# Altium PCB SEG_pressure gauge_up  V2.1.PcbDoc (part 2 of 5)
Units mm, origin at the board's own origin, x right, y up, seen from the top; angles counter-clockwise.
Board outline 67.74 x 67.74 mm, 2 copper layers (Top Layer, Bottom Layer); 36 components, 59 nets, 200 pads, 20 vias.
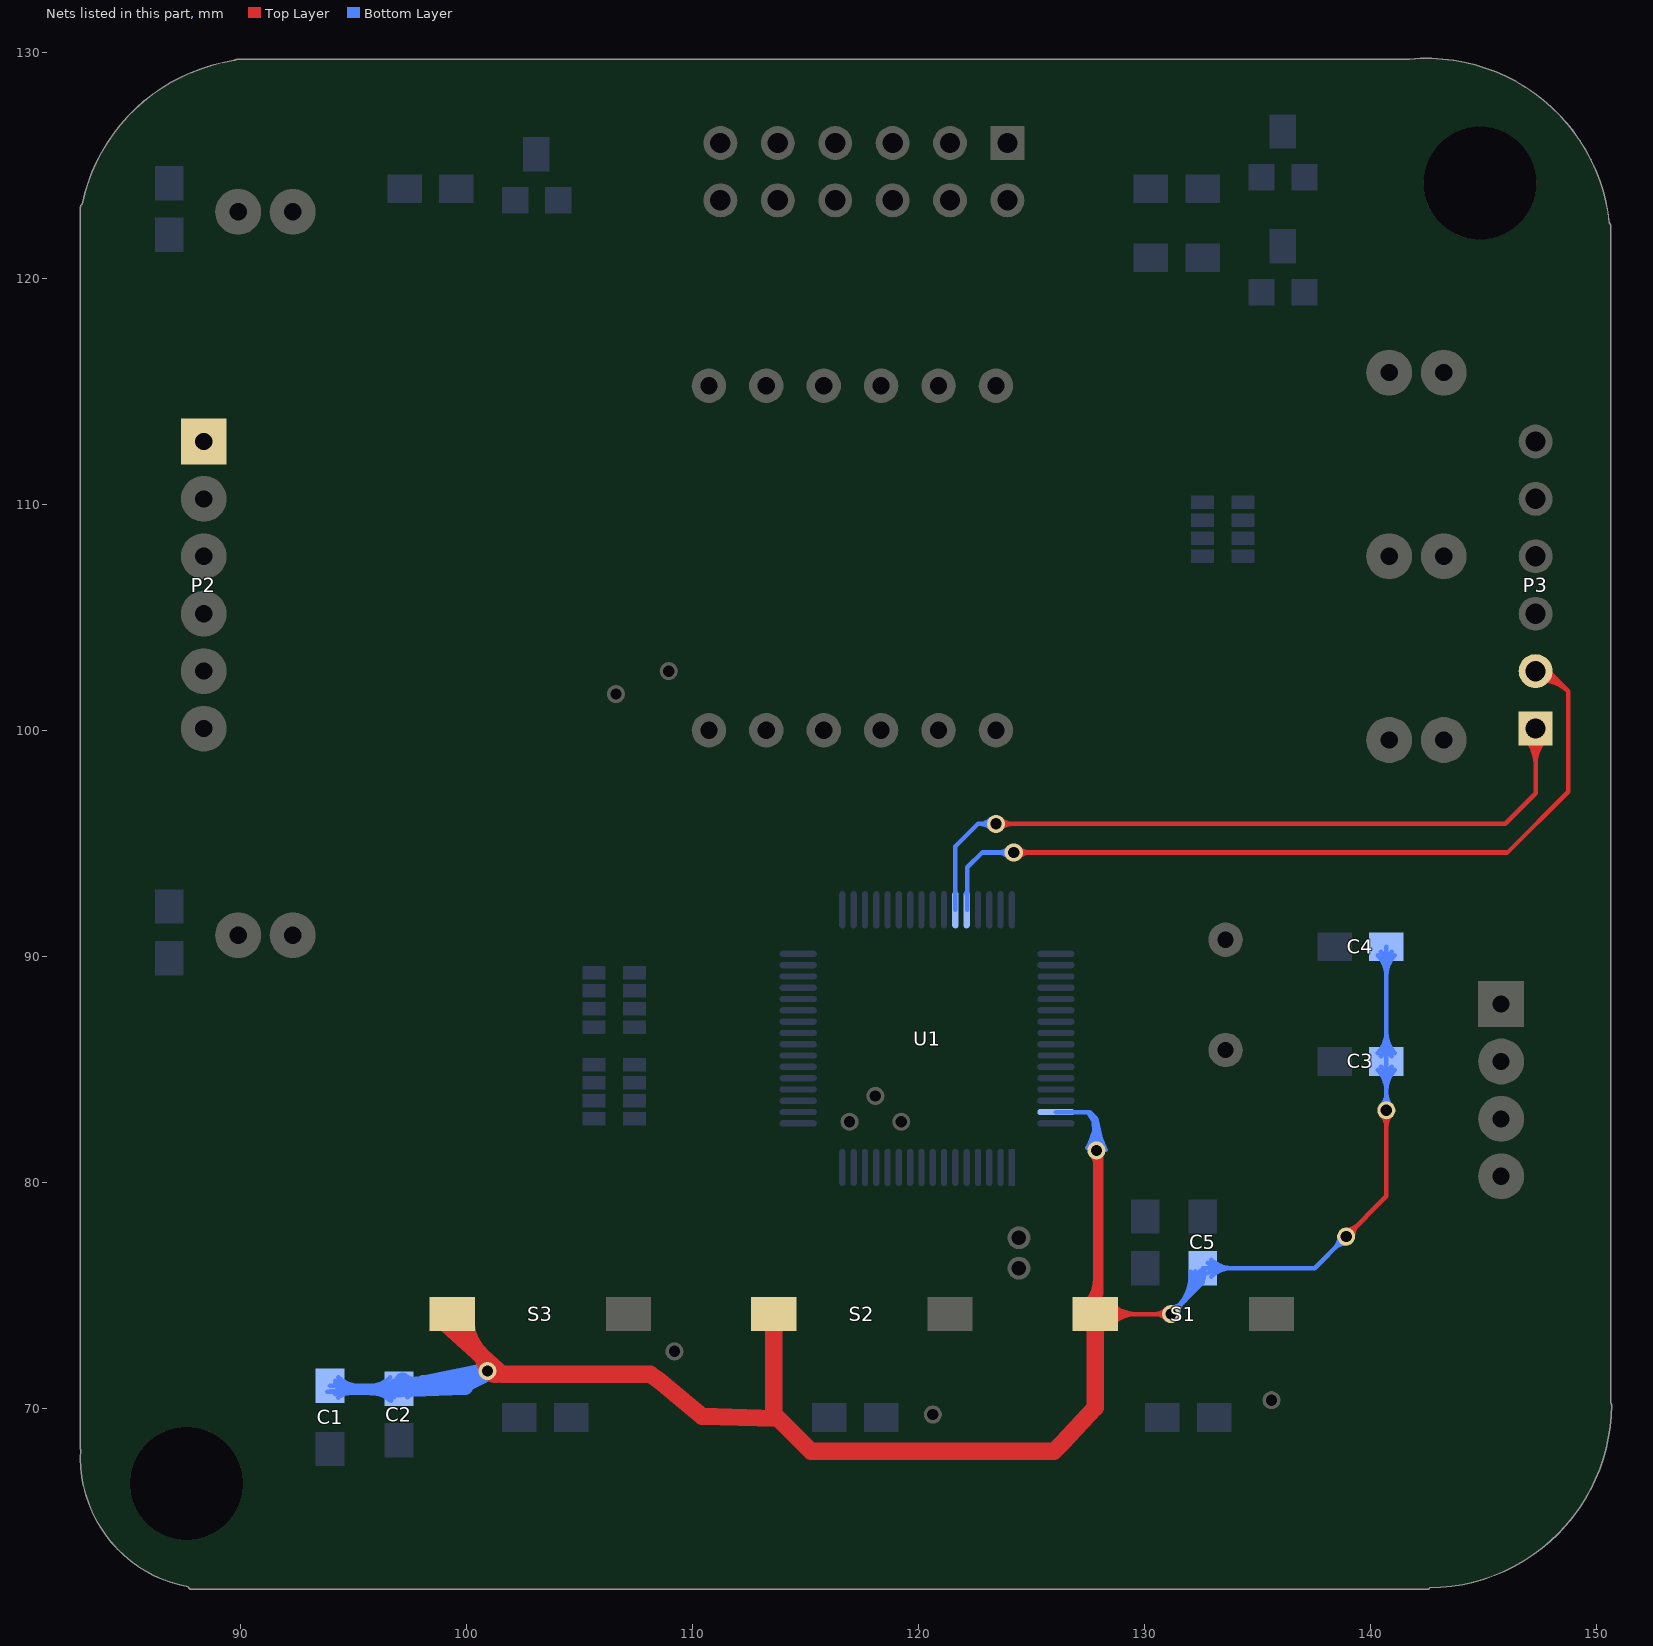
[diagram p2: the nets of this part, all layers, seen from the top]

## Via types
v1: diameter 0.8, hole 0.5, Top Layer to Bottom Layer, 20 vias

## Nets (pads, with @x,y where several pads share a name; then routed paths per layer and width w, separated by ;. In a path a pad name is that pad's centre, name@x,y a point inside that pad or via, vN(x,y) a via of type N, cw(c..) or ccw(c..) an arc to the next point about the centre after c; other vN are vias at no path point) (continued)
CONTROL1: P3.1 U1.43 | length 64.4
  Top Layer w0.203: v1(123.444,95.86) 145.974,95.86 147.32,97.206 ; 147.32,97.257 147.32,97.206 ; P3.1@147.32,100.076 147.32,97.206 ; v1@123.655,95.649 cw(c124.164,95.139) 124.164,95.86 ; v1@123.655,95.649 cw(c124.164,95.139) 124.164,95.86 ; v1@123.655,95.649 cw(c124.164,95.139) 124.164,95.86 ; v1@123.655,95.649 cw(c124.164,95.139) 124.164,95.86 ; v1@123.655,95.649 cw(c124.164,95.139) 124.164,95.86 ; v1@123.655,96.071 ccw(c124.164,96.58) 124.164,95.86 ; v1@123.655,96.071 ccw(c124.164,96.58) 124.164,95.86 ; v1@123.655,96.071 ccw(c124.164,96.58) 124.164,95.86 ; v1@123.655,96.071 ccw(c124.164,96.58) 124.164,95.86 ; v1@123.655,96.071 ccw(c124.164,96.58) 124.164,95.86 ; P3.1@146.862,99.618 cw(c145.755,98.511) 147.32,98.511 ; P3.1@146.862,99.618 cw(c145.755,98.511) 147.32,98.511 ; P3.1@146.862,99.618 cw(c145.755,98.511) 147.32,98.511 ; P3.1@146.862,99.618 cw(c145.755,98.511) 147.32,98.511 ; P3.1@146.862,99.618 cw(c145.755,98.511) 147.32,98.511 ; P3.1@147.005,99.761 cw(c146.245,99.001) 147.32,99.001 ; P3.1@147.005,99.761 cw(c146.245,99.001) 147.32,99.001 ; P3.1@147.005,99.761 cw(c146.245,99.001) 147.32,99.001 ; P3.1@147.005,99.761 cw(c146.245,99.001) 147.32,99.001 ; P3.1@147.005,99.761 cw(c146.245,99.001) 147.32,99.001 ; 147.32,98.511 cw(c148.885,98.511) P3.1@147.778,99.618 ; 147.32,98.511 cw(c148.885,98.511) P3.1@147.778,99.618 ; 147.32,98.511 cw(c148.885,98.511) P3.1@147.778,99.618 ; 147.32,98.511 cw(c148.885,98.511) P3.1@147.778,99.618 ; 147.32,98.511 cw(c148.885,98.511) P3.1@147.778,99.618 ; 147.32,99.001 cw(c148.395,99.001) P3.1@147.635,99.761 ; 147.32,99.001 cw(c148.395,99.001) P3.1@147.635,99.761 ; 147.32,99.001 cw(c148.395,99.001) P3.1@147.635,99.761 ; 147.32,99.001 cw(c148.395,99.001) P3.1@147.635,99.761 ; 147.32,99.001 cw(c148.395,99.001) P3.1@147.635,99.761
  Bottom Layer w0.203: U1.43@121.649,92.056 121.649,94.858 122.651,95.86 v1(123.444,95.86) ; 122.724,95.86 cw(c122.724,95.139) v1@123.233,95.649 ; 122.724,95.86 ccw(c122.724,96.58) v1@123.233,96.071 ; 122.724,95.86 cw(c122.724,95.139) v1@123.233,95.649 ; 122.724,95.86 ccw(c122.724,96.58) v1@123.233,96.071 ; 122.724,95.86 cw(c122.724,95.139) v1@123.233,95.649 ; 122.724,95.86 ccw(c122.724,96.58) v1@123.233,96.071 ; 122.724,95.86 cw(c122.724,95.139) v1@123.233,95.649 ; 122.724,95.86 ccw(c122.724,96.58) v1@123.233,96.071 ; 122.724,95.86 ccw(c122.724,96.58) v1@123.233,96.071 ; 122.724,95.86 cw(c122.724,95.139) v1@123.233,95.649
CONTROL2: P3.2 U1.44 | length 66
  Top Layer w0.203: v1(124.231,94.59) 146.075,94.59 148.768,97.282 148.768,101.727 147.879,102.616 P3.2@147.32,102.616 ; v1@124.442,94.379 cw(c124.952,93.869) 124.952,94.59 ; v1@124.442,94.379 cw(c124.952,93.869) 124.952,94.59 ; v1@124.442,94.379 cw(c124.952,93.869) 124.952,94.59 ; v1@124.442,94.379 cw(c124.952,93.869) 124.952,94.59 ; v1@124.442,94.379 cw(c124.952,93.869) 124.952,94.59 ; v1@124.442,94.801 ccw(c124.952,95.31) 124.952,94.59 ; v1@124.442,94.801 ccw(c124.952,95.31) 124.952,94.59 ; v1@124.442,94.801 ccw(c124.952,95.31) 124.952,94.59 ; v1@124.442,94.801 ccw(c124.952,95.31) 124.952,94.59 ; v1@124.442,94.801 ccw(c124.952,95.31) 124.952,94.59 ; P3.2@147.326,102.578 cw(c147.485,101.577) 148.201,102.293 ; P3.2@147.326,102.578 cw(c147.485,101.577) 148.201,102.293 ; P3.2@147.326,102.578 cw(c147.485,101.577) 148.201,102.293 ; P3.2@147.326,102.578 cw(c147.485,101.577) 148.201,102.293 ; P3.2@147.326,102.578 cw(c147.485,101.577) 148.201,102.293 ; P3.2@147.358,102.377 cw(c147.562,101.09) 148.483,102.011 ; P3.2@147.358,102.377 cw(c147.562,101.09) 148.483,102.011 ; P3.2@147.358,102.377 cw(c147.562,101.09) 148.483,102.011 ; P3.2@147.358,102.377 cw(c147.562,101.09) 148.483,102.011 ; P3.2@147.358,102.377 cw(c147.562,101.09) 148.483,102.011 ; P3.2@147.39,102.176 cw(c147.639,100.604) 148.765,101.73 ; P3.2@147.39,102.176 cw(c147.639,100.604) 148.765,101.73 ; P3.2@147.39,102.176 cw(c147.639,100.604) 148.765,101.73 ; P3.2@147.39,102.176 cw(c147.639,100.604) 148.765,101.73 ; P3.2@147.39,102.176 cw(c147.639,100.604) 148.765,101.73
  Bottom Layer w0.203: U1.44@122.122,92.768 ccw(c121.996,92.895) 122.175,92.895 ; U1.44@122.175,92.056 122.175,93.93 122.834,94.59 v1(124.231,94.59) ; 123.511,94.59 cw(c123.511,93.869) v1@124.02,94.379 ; 123.511,94.59 ccw(c123.511,95.31) v1@124.02,94.801 ; 123.511,94.59 cw(c123.511,93.869) v1@124.02,94.379 ; 123.511,94.59 ccw(c123.511,95.31) v1@124.02,94.801 ; 123.511,94.59 cw(c123.511,93.869) v1@124.02,94.379 ; 123.511,94.59 ccw(c123.511,95.31) v1@124.02,94.801 ; 123.511,94.59 cw(c123.511,93.869) v1@124.02,94.379 ; 123.511,94.59 ccw(c123.511,95.31) v1@124.02,94.801 ; 123.511,94.59 ccw(c123.511,95.31) v1@124.02,94.801 ; 123.511,94.59 cw(c123.511,93.869) v1@124.02,94.379
GND: C1.2 C2.2 C3.1 C4.1 C5.1 P2.1 pad.2@138.938,77.597 pad.3@140.716,83.185 pad.4 pad.18 S1.2 S2.2 S3.2 U1.63 | length 661.5
  Top Layer w0.203: S3.2@99.388,74.168 99.388,73.492 99.388,73.205 ; 101.6,71.501 101.092,71.501 pad.18@100.944,71.649 99.388,73.205 ; 108.153,71.501 108.585,71.501 110.437,69.649 113.612,69.649 ; S2.2@113.612,74.168 113.612,69.748 113.612,69.649 ; 113.716,69.545 113.612,69.649 ; 126.365,68.453 127.836,69.924 127.836,70.028 ; 128.092,75.032 128.092,81.204 127.994,75.135 ; pad.4@131.191,74.168 S1.2@127.836,74.168 ; pad.2@138.938,77.597 140.716,79.375 pad.3@140.716,83.185 ; S3.2@99.144,73.567 cw(c98.997,73.205) 99.388,73.205 ; S3.2@99.144,73.567 cw(c98.997,73.205) 99.388,73.205 ; S3.2@99.144,73.567 cw(c98.997,73.205) 99.388,73.205 ; S3.2@99.144,73.567 cw(c98.997,73.205) 99.388,73.205 ; S3.2@99.144,73.567 cw(c98.997,73.205) 99.388,73.205 ; 99.388,73.205 cw(c99.779,73.205) S3.2@99.632,73.567 ; 99.388,73.205 cw(c99.779,73.205) S3.2@99.632,73.567 ; 99.388,73.205 cw(c99.779,73.205) S3.2@99.632,73.567 ; 99.388,73.205 cw(c99.779,73.205) S3.2@99.632,73.567 ; 99.388,73.205 cw(c99.779,73.205) S3.2@99.632,73.567 ; 100.435,72.158 cw(c99.925,71.649) pad.18@100.646,71.649 ; 100.435,72.158 ccw(c100.944,72.668) pad.18@100.944,71.947 ; 100.435,72.158 cw(c99.925,71.649) pad.18@100.646,71.649 ; 100.435,72.158 ccw(c100.944,72.668) pad.18@100.944,71.947 ; 100.435,72.158 cw(c99.925,71.649) pad.18@100.646,71.649 ; 100.435,72.158 ccw(c100.944,72.668) pad.18@100.944,71.947 ; 100.435,72.158 cw(c99.925,71.649) pad.18@100.646,71.649 ; 100.435,72.158 ccw(c100.944,72.668) pad.18@100.944,71.947 ; 100.435,72.158 ccw(c100.944,72.668) pad.18@100.944,71.947 ; 100.435,72.158 cw(c99.925,71.649) pad.18@100.646,71.649 ; S2.2@113.154,73.71 cw(c112.047,72.603) 113.612,72.603 ; S2.2@113.154,73.71 cw(c112.047,72.603) 113.612,72.603 ; S2.2@113.154,73.71 cw(c112.047,72.603) 113.612,72.603 ; S2.2@113.154,73.71 cw(c112.047,72.603) 113.612,72.603 ; S2.2@113.154,73.71 cw(c112.047,72.603) 113.612,72.603 ; S2.2@113.297,73.853 cw(c112.537,73.093) 113.612,73.093 ; S2.2@113.297,73.853 cw(c112.537,73.093) 113.612,73.093 ; S2.2@113.297,73.853 cw(c112.537,73.093) 113.612,73.093 ; S2.2@113.297,73.853 cw(c112.537,73.093) 113.612,73.093 ; S2.2@113.297,73.853 cw(c112.537,73.093) 113.612,73.093 ; 113.612,72.603 cw(c115.177,72.603) S2.2@114.071,73.71 ; 113.612,72.603 cw(c115.177,72.603) S2.2@114.071,73.71 ; 113.612,72.603 cw(c115.177,72.603) S2.2@114.071,73.71 ; 113.612,72.603 cw(c115.177,72.603) S2.2@114.071,73.71 ; 113.612,72.603 cw(c115.177,72.603) S2.2@114.071,73.71 ; 113.612,73.093 cw(c114.687,73.093) S2.2@113.927,73.853 ; 113.612,73.093 cw(c114.687,73.093) S2.2@113.927,73.853 ; 113.612,73.093 cw(c114.687,73.093) S2.2@113.927,73.853 ; 113.612,73.093 cw(c114.687,73.093) S2.2@113.927,73.853 ; 113.612,73.093 cw(c114.687,73.093) S2.2@113.927,73.853 ; S1.2@127.378,74.626 ccw(c126.271,75.733) 127.836,75.733 ; S1.2@127.378,74.626 ccw(c126.271,75.733) 127.836,75.733 ; S1.2@127.378,74.626 ccw(c126.271,75.733) 127.836,75.733 ; S1.2@127.378,74.626 ccw(c126.271,75.733) 127.836,75.733 ; S1.2@127.378,74.626 ccw(c126.271,75.733) 127.836,75.733 ; S1.2@127.521,74.483 ccw(c126.761,75.243) 127.836,75.243 ; S1.2@127.521,74.483 ccw(c126.761,75.243) 127.836,75.243 ; S1.2@127.521,74.483 ccw(c126.761,75.243) 127.836,75.243 ; S1.2@127.521,74.483 ccw(c126.761,75.243) 127.836,75.243 ; S1.2@127.521,74.483 ccw(c126.761,75.243) 127.836,75.243 ; pad.4@127.675,81.199 cw(c126.651,80.208) 128.076,80.185 ; pad.4@127.675,81.199 cw(c126.651,80.208) 128.076,80.185 ; pad.4@127.675,81.199 cw(c126.651,80.208) 128.076,80.185 ; pad.4@127.675,81.199 cw(c126.651,80.208) 128.076,80.185 ; pad.4@127.675,81.199 cw(c126.651,80.208) 128.076,80.185 ; pad.4@127.678,81.196 cw(c126.678,80.196) 128.092,80.196 ; pad.4@127.678,81.196 cw(c127.297,80.815) 127.836,80.815 ; pad.4@127.678,81.196 cw(c126.678,80.196) 128.092,80.196 ; pad.4@127.678,81.196 cw(c127.297,80.815) 127.836,80.815 ; pad.4@127.678,81.196 cw(c126.678,80.196) 128.092,80.196 ; pad.4@127.678,81.196 cw(c127.297,80.815) 127.836,80.815 ; pad.4@127.678,81.196 cw(c126.678,80.196) 128.092,80.196 ; pad.4@127.678,81.196 cw(c127.297,80.815) 127.836,80.815 ; pad.4@127.678,81.196 cw(c127.297,80.815) 127.836,80.815 ; pad.4@127.678,81.196 cw(c126.678,80.196) 128.092,80.196 ; pad.4@127.681,81.193 cw(c127.18,80.675) 127.9,80.687 ; pad.4@127.681,81.193 cw(c127.18,80.675) 127.9,80.687 ; pad.4@127.681,81.193 cw(c127.18,80.675) 127.9,80.687 ; pad.4@127.681,81.193 cw(c127.18,80.675) 127.9,80.687 ; pad.4@127.681,81.193 cw(c127.18,80.675) 127.9,80.687 ; S1.2@127.776,74.488 ccw(c127.284,74.996) 127.991,74.984 ; S1.2@127.776,74.488 ccw(c127.284,74.996) 127.991,74.984 ; S1.2@127.776,74.488 ccw(c127.284,74.996) 127.991,74.984 ; S1.2@127.776,74.488 ccw(c127.284,74.996) 127.991,74.984 ; S1.2@127.776,74.488 ccw(c127.284,74.996) 127.991,74.984 ; S1.2@127.776,74.488 ccw(c127.284,74.996) 127.991,74.984 ; S1.2@127.776,74.488 ccw(c127.284,74.996) 127.991,74.984 ; S1.2@127.776,74.488 ccw(c127.284,74.996) 127.991,74.984 ; S1.2@127.776,74.488 ccw(c127.284,74.996) 127.991,74.984 ; S1.2@127.776,74.488 ccw(c127.284,74.996) 127.991,74.984 ; pad.4@127.821,81.341 cw(c127.149,80.691) 128.084,80.675 ; pad.4@127.821,81.341 cw(c127.149,80.691) 128.084,80.675 ; pad.4@127.821,81.341 cw(c127.149,80.691) 128.084,80.675 ; pad.4@127.821,81.341 cw(c127.149,80.691) 128.084,80.675 ; pad.4@127.821,81.341 cw(c127.149,80.691) 128.084,80.675 ; pad.4@127.822,81.34 cw(c127.169,80.687) 128.092,80.687 ; pad.4@127.822,81.34 cw(c127.169,80.687) 128.092,80.687 ; pad.4@127.822,81.34 cw(c127.169,80.687) 128.092,80.687 ; pad.4@127.822,81.34 cw(c127.169,80.687) 128.092,80.687 ; pad.4@127.822,81.34 cw(c127.169,80.687) 128.092,80.687 ; S1.2@127.836,74.168 127.836,81.354 pad.4@127.889,81.407 127.988,75.098 ; S1.2@127.836,74.168 127.988,75.098 ; 127.836,75.243 ccw(c128.911,75.243) S1.2@128.151,74.483 ; 127.836,75.243 ccw(c128.911,75.243) S1.2@128.151,74.483 ; 127.836,75.243 ccw(c128.911,75.243) S1.2@128.151,74.483 ; 127.836,75.243 ccw(c128.911,75.243) S1.2@128.151,74.483 ; 127.836,75.243 ccw(c128.911,75.243) S1.2@128.151,74.483 ; 127.836,75.733 ccw(c129.401,75.733) S1.2@128.295,74.626 ; 127.836,75.733 ccw(c129.401,75.733) S1.2@128.295,74.626 ; 127.836,75.733 ccw(c129.401,75.733) S1.2@128.295,74.626 ; 127.836,75.733 ccw(c129.401,75.733) S1.2@128.295,74.626 ; 127.836,75.733 ccw(c129.401,75.733) S1.2@128.295,74.626 ; 127.836,80.559 cw(c128.737,80.559) pad.4@128.1,81.196 ; 127.836,80.559 cw(c128.737,80.559) pad.4@128.1,81.196 ; 127.836,80.559 cw(c128.737,80.559) pad.4@128.1,81.196 ; 127.836,80.559 cw(c128.737,80.559) pad.4@128.1,81.196 ; 127.836,80.559 cw(c128.737,80.559) pad.4@128.1,81.196 ; 127.9,80.687 cw(c128.621,80.698) pad.4@128.103,81.199 ; 127.9,80.687 cw(c128.621,80.698) pad.4@128.103,81.199 ; 127.9,80.687 cw(c128.621,80.698) pad.4@128.103,81.199 ; 127.9,80.687 cw(c128.621,80.698) pad.4@128.103,81.199 ; 127.9,80.687 cw(c128.621,80.698) pad.4@128.103,81.199 ; 127.988,75.098 127.994,75.135 ; 127.988,75.098 127.991,74.93 127.994,75.135 ; 127.992,75.014 ccw(c128.944,74.999) S1.2@128.26,74.336 ; 127.992,75.014 ccw(c128.944,74.999) S1.2@128.26,74.336 ; 127.992,75.014 ccw(c128.944,74.999) S1.2@128.26,74.336 ; 127.992,75.014 ccw(c128.944,74.999) S1.2@128.26,74.336 ; 127.992,75.014 ccw(c128.944,74.999) S1.2@128.26,74.336 ; 127.992,75.014 ccw(c128.944,74.999) S1.2@128.26,74.336 ; 127.992,75.014 ccw(c128.944,74.999) S1.2@128.26,74.336 ; 127.992,75.014 ccw(c128.944,74.999) S1.2@128.26,74.336 ; 127.992,75.014 ccw(c128.944,74.999) S1.2@128.26,74.336 ; 127.992,75.014 ccw(c128.944,74.999) S1.2@128.26,74.336 ; S1.2@128.401,73.853 cw(c129.161,73.093) 129.161,74.168 ; S1.2@128.401,73.853 cw(c129.161,73.093) 129.161,74.168 ; S1.2@128.401,73.853 cw(c129.161,73.093) 129.161,74.168 ; S1.2@128.401,73.853 cw(c129.161,73.093) 129.161,74.168 ; S1.2@128.401,73.853 cw(c129.161,73.093) 129.161,74.168 ; S1.2@128.401,74.483 ccw(c129.161,75.243) 129.161,74.168 ; S1.2@128.401,74.483 ccw(c129.161,75.243) 129.161,74.168 ; S1.2@128.401,74.483 ccw(c129.161,75.243) 129.161,74.168 ; S1.2@128.401,74.483 ccw(c129.161,75.243) 129.161,74.168 ; S1.2@128.401,74.483 ccw(c129.161,75.243) 129.161,74.168 ; S1.2@128.545,73.71 cw(c129.651,72.603) 129.651,74.168 ; S1.2@128.545,73.71 cw(c129.651,72.603) 129.651,74.168 ; S1.2@128.545,73.71 cw(c129.651,72.603) 129.651,74.168 ; S1.2@128.545,73.71 cw(c129.651,72.603) 129.651,74.168 ; S1.2@128.545,73.71 cw(c129.651,72.603) 129.651,74.168 ; S1.2@128.545,74.626 ccw(c129.651,75.733) 129.651,74.168 ; S1.2@128.545,74.626 ccw(c129.651,75.733) 129.651,74.168 ; S1.2@128.545,74.626 ccw(c129.651,75.733) 129.651,74.168 ; S1.2@128.545,74.626 ccw(c129.651,75.733) 129.651,74.168 ; S1.2@128.545,74.626 ccw(c129.651,75.733) 129.651,74.168 ; 130.471,74.168 cw(c130.471,73.448) pad.4@130.98,73.957 ; 130.471,74.168 ccw(c130.471,74.888) pad.4@130.98,74.379 ; 130.471,74.168 cw(c130.471,73.448) pad.4@130.98,73.957 ; 130.471,74.168 ccw(c130.471,74.888) pad.4@130.98,74.379 ; 130.471,74.168 cw(c130.471,73.448) pad.4@130.98,73.957 ; 130.471,74.168 ccw(c130.471,74.888) pad.4@130.98,74.379 ; 130.471,74.168 cw(c130.471,73.448) pad.4@130.98,73.957 ; 130.471,74.168 ccw(c130.471,74.888) pad.4@130.98,74.379 ; 130.471,74.168 ccw(c130.471,74.888) pad.4@130.98,74.379 ; 130.471,74.168 cw(c130.471,73.448) pad.4@130.98,73.957 ; pad.2@138.938,77.895 ccw(c138.938,78.616) 139.447,78.106 ; pad.2@138.938,77.895 ccw(c138.938,78.616) 139.447,78.106 ; pad.2@138.938,77.895 ccw(c138.938,78.616) 139.447,78.106 ; pad.2@138.938,77.895 ccw(c138.938,78.616) 139.447,78.106 ; pad.2@138.938,77.895 ccw(c138.938,78.616) 139.447,78.106 ; pad.2@139.236,77.597 cw(c139.957,77.597) 139.447,78.106 ; pad.2@139.236,77.597 cw(c139.957,77.597) 139.447,78.106 ; pad.2@139.236,77.597 cw(c139.957,77.597) 139.447,78.106 ; pad.2@139.236,77.597 cw(c139.957,77.597) 139.447,78.106 ; pad.2@139.236,77.597 cw(c139.957,77.597) 139.447,78.106 ; pad.3@140.505,82.974 cw(c139.996,82.465) 140.716,82.465 ; pad.3@140.505,82.974 cw(c139.996,82.465) 140.716,82.465 ; pad.3@140.505,82.974 cw(c139.996,82.465) 140.716,82.465 ; pad.3@140.505,82.974 cw(c139.996,82.465) 140.716,82.465 ; pad.3@140.505,82.974 cw(c139.996,82.465) 140.716,82.465 ; 140.716,82.465 cw(c141.436,82.465) pad.3@140.927,82.974 ; 140.716,82.465 cw(c141.436,82.465) pad.3@140.927,82.974 ; 140.716,82.465 cw(c141.436,82.465) pad.3@140.927,82.974 ; 140.716,82.465 cw(c141.436,82.465) pad.3@140.927,82.974 ; 140.716,82.465 cw(c141.436,82.465) pad.3@140.927,82.974
  Top Layer w0.762: S3.2@99.111,73.965 99.123,73.73 99.388,73.492 101.164,71.893 101.6,71.501 108.153,71.501 108.585,71.196 110.437,69.649 113.716,69.545 ; S2.2@113.612,73.863 113.612,69.748 115.263,68.097 126.009,68.097 126.365,68.453 127.836,70.028 S1.2@127.836,74.168 ; S3.2@99.247,74.207 ccw(c100.314,74.101) 99.597,73.304 ; S3.2@99.247,74.207 ccw(c100.314,74.101) 99.597,73.304 ; S3.2@99.247,74.207 ccw(c100.314,74.101) 99.597,73.304 ; S3.2@99.247,74.207 ccw(c100.314,74.101) 99.597,73.304 ; S3.2@99.247,74.207 ccw(c100.314,74.101) 99.597,73.304 ; S3.2@100.005,74.132 ccw(c102.174,73.917) 100.716,72.297 ; S3.2@100.005,74.132 ccw(c102.174,73.917) 100.716,72.297 ; S3.2@100.005,74.132 ccw(c102.174,73.917) 100.716,72.297 ; S3.2@100.005,74.132 ccw(c102.174,73.917) 100.716,72.297 ; S3.2@100.005,74.132 ccw(c102.174,73.917) 100.716,72.297 ; 100.54,72.455 cw(c99.758,71.586) pad.18@100.925,71.648 ; 100.54,72.455 cw(c99.758,71.586) pad.18@100.925,71.648 ; 100.54,72.455 cw(c99.758,71.586) pad.18@100.925,71.648 ; 100.54,72.455 cw(c99.758,71.586) pad.18@100.925,71.648 ; 100.54,72.455 cw(c99.758,71.586) pad.18@100.925,71.648 ; pad.18@100.958,71.662 ccw(c101.347,72.051) 101.347,71.501 ; pad.18@100.958,71.662 ccw(c101.347,72.051) 101.347,71.501 ; pad.18@100.958,71.662 ccw(c101.347,72.051) 101.347,71.501 ; pad.18@100.958,71.662 ccw(c101.347,72.051) 101.347,71.501 ; pad.18@100.958,71.662 ccw(c101.347,72.051) 101.347,71.501 ; S2.2@113.351,73.907 cw(c112.721,73.277) 113.612,73.277 ; S2.2@113.351,73.907 cw(c112.721,73.277) 113.612,73.277 ; S2.2@113.351,73.907 cw(c112.721,73.277) 113.612,73.277 ; S2.2@113.351,73.907 cw(c112.721,73.277) 113.612,73.277 ; S2.2@113.351,73.907 cw(c112.721,73.277) 113.612,73.277 ; 113.612,73.277 cw(c114.503,73.277) S2.2@113.873,73.907 ; 113.612,73.277 cw(c114.503,73.277) S2.2@113.873,73.907 ; 113.612,73.277 cw(c114.503,73.277) S2.2@113.873,73.907 ; 113.612,73.277 cw(c114.503,73.277) S2.2@113.873,73.907 ; 113.612,73.277 cw(c114.503,73.277) S2.2@113.873,73.907 ; S1.2@127.575,73.907 cw(c126.945,73.277) 127.836,73.277 ; S1.2@127.575,73.907 cw(c126.945,73.277) 127.836,73.277 ; S1.2@127.575,73.907 cw(c126.945,73.277) 127.836,73.277 ; S1.2@127.575,73.907 cw(c126.945,73.277) 127.836,73.277 ; S1.2@127.575,73.907 cw(c126.945,73.277) 127.836,73.277 ; 127.836,73.277 cw(c128.727,73.277) S1.2@128.097,73.907 ; 127.836,73.277 cw(c128.727,73.277) S1.2@128.097,73.907 ; 127.836,73.277 cw(c128.727,73.277) S1.2@128.097,73.907 ; 127.836,73.277 cw(c128.727,73.277) S1.2@128.097,73.907 ; 127.836,73.277 cw(c128.727,73.277) S1.2@128.097,73.907
  Bottom Layer w0.203: C1.2@94.539,70.637 95.098,70.689 ; C2.2@97.561,71.222 98.104,71.081 98.247,71.044 ; 99.924,70.993 C2.2@97.028,70.866 ; U1.63@126.099,83.106 127.508,83.106 ; 127.483,81.534 127.549,81.634 127.584,81.686 ; 127.635,83.058 127.587,83.106 ; pad.4@131.191,74.168 132.588,75.565 C5.1@132.588,76.2 137.541,76.2 pad.2@138.811,77.47 ; pad.3@140.716,83.185 C3.1@140.716,85.344 C4.1@140.716,90.424 ; C1.2@94.204,70.623 cw(c95.037,69.718) 95.088,70.947 ; C1.2@94.204,70.623 cw(c95.037,69.718) 95.088,70.947 ; C1.2@94.204,70.623 cw(c95.037,69.718) 95.088,70.947 ; C1.2@94.204,70.623 cw(c95.037,69.718) 95.088,70.947 ; C1.2@94.204,70.623 cw(c95.037,69.718) 95.088,70.947 ; C1.2@94.21,71.103 ccw(c94.991,71.906) 95.036,70.786 ; C1.2@94.21,71.103 ccw(c94.991,71.906) 95.036,70.786 ; C1.2@94.21,71.103 ccw(c94.991,71.906) 95.036,70.786 ; C1.2@94.21,71.103 ccw(c94.991,71.906) 95.036,70.786 ; C1.2@94.21,71.103 ccw(c94.991,71.906) 95.036,70.786 ; C1.2@94.213,70.76 cw(c94.777,70.196) 94.777,70.993 ; C1.2@94.213,70.76 cw(c94.777,70.196) 94.777,70.993 ; C1.2@94.213,70.76 cw(c94.777,70.196) 94.777,70.993 ; C1.2@94.213,70.76 cw(c94.777,70.196) 94.777,70.993 ; C1.2@94.213,70.76 cw(c94.777,70.196) 94.777,70.993 ; C1.2@94.213,71.226 ccw(c94.777,71.79) 94.777,70.993 ; C1.2@94.213,71.226 ccw(c94.777,71.79) 94.777,70.993 ; C1.2@94.213,71.226 ccw(c94.777,71.79) 94.777,70.993 ; C1.2@94.213,71.226 ccw(c94.777,71.79) 94.777,70.993 ; C1.2@94.213,71.226 ccw(c94.777,71.79) 94.777,70.993 ; C1.2@94.276,71.012 ccw(c94.773,71.256) 94.751,70.703 ; C1.2@94.276,71.012 ccw(c94.773,71.256) 94.751,70.703 ; C1.2@94.276,71.012 ccw(c94.773,71.256) 94.751,70.703 ; C1.2@94.276,71.012 ccw(c94.773,71.256) 94.751,70.703 ; C1.2@94.276,71.012 ccw(c94.773,71.256) 94.751,70.703 ; C1.2@94.341,70.473 cw(c95.506,69.207) 95.578,70.926 ; C1.2@94.341,70.473 cw(c95.506,69.207) 95.578,70.926 ; C1.2@94.341,70.473 cw(c95.506,69.207) 95.578,70.926 ; C1.2@94.341,70.473 cw(c95.506,69.207) 95.578,70.926 ; C1.2@94.341,70.473 cw(c95.506,69.207) 95.578,70.926 ; C1.2@94.342,70.474 cw(c94.909,69.859) 94.943,70.695 ; C1.2@94.342,70.474 cw(c94.909,69.859) 94.943,70.695 ; C1.2@94.342,70.474 cw(c94.909,69.859) 94.943,70.695 ; C1.2@94.342,70.474 cw(c94.909,69.859) 94.943,70.695 ; C1.2@94.342,70.474 cw(c94.909,69.859) 94.943,70.695 ; C1.2@94.352,71.248 ccw(c95.446,72.373) 95.509,70.805 ; C1.2@94.352,71.248 ccw(c95.446,72.373) 95.509,70.805 ; C1.2@94.352,71.248 ccw(c95.446,72.373) 95.509,70.805 ; C1.2@94.352,71.248 ccw(c95.446,72.373) 95.509,70.805 ; C1.2@94.352,71.248 ccw(c95.446,72.373) 95.509,70.805 ; C1.2@94.357,70.616 cw(c95.268,69.705) 95.268,70.993 ; C1.2@94.357,70.616 cw(c95.268,69.705) 95.268,70.993 ; C1.2@94.357,70.616 cw(c95.268,69.705) 95.268,70.993 ; C1.2@94.357,70.616 cw(c95.268,69.705) 95.268,70.993 ; C1.2@94.357,70.616 cw(c95.268,69.705) 95.268,70.993 ; C1.2@94.357,71.37 ccw(c95.268,72.281) 95.268,70.993 ; C1.2@94.357,71.37 ccw(c95.268,72.281) 95.268,70.993 ; C1.2@94.357,71.37 ccw(c95.268,72.281) 95.268,70.993 ; C1.2@94.357,71.37 ccw(c95.268,72.281) 95.268,70.993 ; C1.2@94.357,71.37 ccw(c95.268,72.281) 95.268,70.993 ; C1.2@94.372,70.504 cw(c95.013,69.913) 94.978,70.784 ; C1.2@94.372,70.504 cw(c95.013,69.913) 94.978,70.784 ; C1.2@94.372,70.504 cw(c95.013,69.913) 94.978,70.784 ; C1.2@94.372,70.504 cw(c95.013,69.913) 94.978,70.784 ; C1.2@94.372,70.504 cw(c95.013,69.913) 94.978,70.784 ; C1.2@94.373,71.227 ccw(c95.001,71.806) 94.966,70.952 ; C1.2@94.373,71.227 ccw(c95.001,71.806) 94.966,70.952 ; C1.2@94.373,71.227 ccw(c95.001,71.806) 94.966,70.952 ; C1.2@94.373,71.227 ccw(c95.001,71.806) 94.966,70.952 ; C1.2@94.373,71.227 ccw(c95.001,71.806) 94.966,70.952 ; C1.2@94.459,71.101 ccw(c95.122,71.428) 95.092,70.689 ; C1.2@94.459,71.101 ccw(c95.122,71.428) 95.092,70.689 ; C1.2@94.459,71.101 ccw(c95.122,71.428) 95.092,70.689 ; C1.2@94.459,71.101 ccw(c95.122,71.428) 95.092,70.689 ; C1.2@94.459,71.101 ccw(c95.122,71.428) 95.092,70.689 ; 95.098,70.689 93.97,70.734 93.853,70.739 93.99,70.744 C2.2@97.028,70.866 ; 95.098,70.689 C2.2@97.028,70.866 ; 95.098,70.689 96.368,70.637 C2.2@97.028,70.866 ; 95.43,70.719 cw(c95.587,69.007) C2.2@96.687,70.329 ; 95.43,70.719 cw(c95.587,69.007) C2.2@96.687,70.329 ; 95.43,70.719 cw(c95.587,69.007) C2.2@96.687,70.329 ; 95.43,70.719 cw(c95.587,69.007) C2.2@96.687,70.329 ; 95.43,70.719 cw(c95.587,69.007) C2.2@96.687,70.329 ; 95.43,70.802 cw(c95.499,69.082) C2.2@96.666,70.347 ; 95.43,70.802 cw(c95.499,69.082) C2.2@96.666,70.347 ; 95.43,70.802 cw(c95.499,69.082) C2.2@96.666,70.347 ; 95.43,70.802 cw(c95.499,69.082) C2.2@96.666,70.347 ; 95.43,70.802 cw(c95.499,69.082) C2.2@96.666,70.347 ; 95.74,70.993 cw(c95.74,69.705) C2.2@96.651,70.616 ; 95.74,70.993 ccw(c95.74,72.281) C2.2@96.651,71.37 ; 95.74,70.993 cw(c95.74,69.705) C2.2@96.651,70.616 ; 95.74,70.993 ccw(c95.74,72.281) C2.2@96.651,71.37 ; 95.74,70.993 cw(c95.74,69.705) C2.2@96.651,70.616 ; 95.74,70.993 ccw(c95.74,72.281) C2.2@96.651,71.37 ; 95.74,70.993 cw(c95.74,69.705) C2.2@96.651,70.616 ; 95.74,70.993 ccw(c95.74,72.281) C2.2@96.651,71.37 ; 95.74,70.993 ccw(c95.74,72.281) C2.2@96.651,71.37 ; 95.74,70.993 cw(c95.74,69.705) C2.2@96.651,70.616 ; 95.778,70.661 ccw(c95.817,71.631) C2.2@96.599,71.055 ; 95.778,70.661 ccw(c95.817,71.631) C2.2@96.599,71.055 ; 95.778,70.661 ccw(c95.817,71.631) C2.2@96.599,71.055 ; 95.778,70.661 ccw(c95.817,71.631) C2.2@96.599,71.055 ; 95.778,70.661 ccw(c95.817,71.631) C2.2@96.599,71.055 ; 95.919,70.764 cw(c96.031,69.54) C2.2@96.817,70.485 ; 95.919,70.764 cw(c96.031,69.54) C2.2@96.817,70.485 ; 95.919,70.764 cw(c96.031,69.54) C2.2@96.817,70.485 ; 95.919,70.764 cw(c96.031,69.54) C2.2@96.817,70.485 ; 95.919,70.764 cw(c96.031,69.54) C2.2@96.817,70.485 ; 95.92,70.822 cw(c95.969,69.592) C2.2@96.804,70.496 ; 95.92,70.822 cw(c95.969,69.592) C2.2@96.804,70.496 ; 95.92,70.822 cw(c95.969,69.592) C2.2@96.804,70.496 ; 95.92,70.822 cw(c95.969,69.592) C2.2@96.804,70.496 ; 95.92,70.822 cw(c95.969,69.592) C2.2@96.804,70.496 ; 96.038,70.775 ccw(c95.96,71.627) C2.2@96.618,71.08 ; 96.038,70.775 ccw(c95.96,71.627) C2.2@96.618,71.08 ; 96.038,70.775 ccw(c95.96,71.627) C2.2@96.618,71.08 ; 96.038,70.775 ccw(c95.96,71.627) C2.2@96.618,71.08 ; 96.038,70.775 ccw(c95.96,71.627) C2.2@96.618,71.08 ; 96.042,70.827 ccw(c96.008,71.68) C2.2@96.636,71.101 ; 96.042,70.827 ccw(c96.008,71.68) C2.2@96.636,71.101 ; 96.042,70.827 ccw(c96.008,71.68) C2.2@96.636,71.101 ; 96.042,70.827 ccw(c96.008,71.68) C2.2@96.636,71.101 ; 96.042,70.827 ccw(c96.008,71.68) C2.2@96.636,71.101 ; 96.045,70.65 cw(c96.011,69.801) C2.2@96.636,70.377 ; 96.045,70.65 cw(c96.011,69.801) C2.2@96.636,70.377 ; 96.045,70.65 cw(c96.011,69.801) C2.2@96.636,70.377 ; 96.045,70.65 cw(c96.011,69.801) C2.2@96.636,70.377 ; 96.045,70.65 cw(c96.011,69.801) C2.2@96.636,70.377 ; 96.16,70.646 ccw(c96.189,71.357) C2.2@96.762,70.935 ; 96.16,70.646 ccw(c96.189,71.357) C2.2@96.762,70.935 ; 96.16,70.646 ccw(c96.189,71.357) C2.2@96.762,70.935 ; 96.16,70.646 ccw(c96.189,71.357) C2.2@96.762,70.935 ; 96.16,70.646 ccw(c96.189,71.357) C2.2@96.762,70.935 ; 96.231,70.993 cw(c96.231,70.196) C2.2@96.795,70.76 ; 96.231,70.993 ccw(c96.231,71.79) C2.2@96.795,71.226 ; 96.231,70.993 cw(c96.231,70.196) C2.2@96.795,70.76 ; 96.231,70.993 ccw(c96.231,71.79) C2.2@96.795,71.226 ; 96.231,70.993 cw(c96.231,70.196) C2.2@96.795,70.76 ; 96.231,70.993 ccw(c96.231,71.79) C2.2@96.795,71.226 ; 96.231,70.993 cw(c96.231,70.196) C2.2@96.795,70.76 ; 96.231,70.993 ccw(c96.231,71.79) C2.2@96.795,71.226 ; 96.231,70.993 ccw(c96.231,71.79) C2.2@96.795,71.226 ; 96.231,70.993 cw(c96.231,70.196) C2.2@96.795,70.76 ; C2.2@97.028,70.866 100.044,71.035 ; C2.2@97.028,70.866 98.247,71.044 ; C2.2@97.028,70.866 99.797,70.866 ; C2.2@97.028,70.866 99.857,70.907 ; C2.2@97.028,70.866 96.901,70.993 C1.2@93.98,70.993 C2.2@97.028,70.866 ; C2.2@97.141,70.935 cw(c97.578,70.71) 97.701,71.185 ; C2.2@97.141,70.935 cw(c97.578,70.71) 97.701,71.185 ; C2.2@97.141,70.935 cw(c97.578,70.71) 97.701,71.185 ; C2.2@97.141,70.935 cw(c97.578,70.71) 97.701,71.185 ; C2.2@97.141,70.935 cw(c97.578,70.71) 97.701,71.185 ; C2.2@97.248,71.239 ccw(c98.068,72.156) 98.137,70.928 ; C2.2@97.248,71.239 ccw(c98.068,72.156) 98.137,70.928 ; C2.2@97.248,71.239 ccw(c98.068,72.156) 98.137,70.928 ; C2.2@97.248,71.239 ccw(c98.068,72.156) 98.137,70.928 ; C2.2@97.248,71.239 ccw(c98.068,72.156) 98.137,70.928 ; C2.2@97.258,71.103 ccw(c97.814,71.675) 97.825,70.878 ; C2.2@97.258,71.103 ccw(c97.814,71.675) 97.825,70.878 ; C2.2@97.258,71.103 ccw(c97.814,71.675) 97.825,70.878 ; C2.2@97.258,71.103 ccw(c97.814,71.675) 97.825,70.878 ; C2.2@97.258,71.103 ccw(c97.814,71.675) 97.825,70.878 ; C2.2@97.261,70.633 cw(c97.825,70.069) 97.825,70.866 ; C2.2@97.261,70.633 cw(c97.825,70.069) 97.825,70.866 ; C2.2@97.261,70.633 cw(c97.825,70.069) 97.825,70.866 ; C2.2@97.261,70.633 cw(c97.825,70.069) 97.825,70.866 ; C2.2@97.261,70.633 cw(c97.825,70.069) 97.825,70.866 ; C2.2@97.261,71.099 ccw(c97.825,71.663) 97.825,70.866 ; C2.2@97.261,71.099 ccw(c97.825,71.663) 97.825,70.866 ; C2.2@97.261,71.099 ccw(c97.825,71.663) 97.825,70.866 ; C2.2@97.261,71.099 ccw(c97.825,71.663) 97.825,70.866 ; C2.2@97.261,71.099 ccw(c97.825,71.663) 97.825,70.866 ; C2.2@97.265,70.636 cw(c97.837,70.08) 97.825,70.878 ; C2.2@97.265,70.636 cw(c97.837,70.08) 97.825,70.878 ; C2.2@97.265,70.636 cw(c97.837,70.08) 97.825,70.878 ; C2.2@97.265,70.636 cw(c97.837,70.08) 97.825,70.878 ; C2.2@97.265,70.636 cw(c97.837,70.08) 97.825,70.878 ; C2.2@97.267,71.22 ccw(c97.992,71.908) 98.036,70.91 ; C2.2@97.267,71.22 ccw(c97.992,71.908) 98.036,70.91 ; C2.2@97.267,71.22 ccw(c97.992,71.908) 98.036,70.91 ; C2.2@97.267,71.22 ccw(c97.992,71.908) 98.036,70.91 ; C2.2@97.267,71.22 ccw(c97.992,71.908) 98.036,70.91 ; C2.2@97.322,70.842 cw(c97.809,70.591) 97.947,71.122 ; C2.2@97.322,70.842 cw(c97.809,70.591) 97.947,71.122 ; C2.2@97.322,70.842 cw(c97.809,70.591) 97.947,71.122 ; C2.2@97.322,70.842 cw(c97.809,70.591) 97.947,71.122 ; C2.2@97.322,70.842 cw(c97.809,70.591) 97.947,71.122 ; C2.2@97.383,71.391 ccw(c98.53,72.673) 98.626,70.955 ; C2.2@97.383,71.391 ccw(c98.53,72.673) 98.626,70.955 ; C2.2@97.383,71.391 ccw(c98.53,72.673) 98.626,70.955 ; C2.2@97.383,71.391 ccw(c98.53,72.673) 98.626,70.955 ; C2.2@97.383,71.391 ccw(c98.53,72.673) 98.626,70.955 ; C2.2@97.4,71.249 ccw(c98.297,72.172) 98.316,70.885 ; C2.2@97.4,71.249 ccw(c98.297,72.172) 98.316,70.885 ; C2.2@97.4,71.249 ccw(c98.297,72.172) 98.316,70.885 ; C2.2@97.4,71.249 ccw(c98.297,72.172) 98.316,70.885 ; C2.2@97.4,71.249 ccw(c98.297,72.172) 98.316,70.885 ; C2.2@97.405,70.489 cw(c98.316,69.578) 98.316,70.866 ; C2.2@97.405,70.489 cw(c98.316,69.578) 98.316,70.866 ; C2.2@97.405,70.489 cw(c98.316,69.578) 98.316,70.866 ; C2.2@97.405,70.489 cw(c98.316,69.578) 98.316,70.866 ; C2.2@97.405,70.489 cw(c98.316,69.578) 98.316,70.866 ; C2.2@97.405,71.243 ccw(c98.316,72.154) 98.316,70.866 ; C2.2@97.405,71.243 ccw(c98.316,72.154) 98.316,70.866 ; C2.2@97.405,71.243 ccw(c98.316,72.154) 98.316,70.866 ; C2.2@97.405,71.243 ccw(c98.316,72.154) 98.316,70.866 ; C2.2@97.405,71.243 ccw(c98.316,72.154) 98.316,70.866 ; C2.2@97.411,70.494 cw(c98.334,69.597) 98.316,70.885 ; C2.2@97.411,70.494 cw(c98.334,69.597) 98.316,70.885 ; C2.2@97.411,70.494 cw(c98.334,69.597) 98.316,70.885 ; C2.2@97.411,70.494 cw(c98.334,69.597) 98.316,70.885 ; C2.2@97.411,70.494 cw(c98.334,69.597) 98.316,70.885 ; C2.2@97.415,71.36 ccw(c98.421,72.315) 98.481,70.93 ; C2.2@97.415,71.36 ccw(c98.421,72.315) 98.481,70.93 ; C2.2@97.415,71.36 ccw(c98.421,72.315) 98.481,70.93 ; C2.2@97.415,71.36 ccw(c98.421,72.315) 98.481,70.93 ; C2.2@97.415,71.36 ccw(c98.421,72.315) 98.481,70.93 ; C2.2@97.421,70.633 cw(c98.051,70.056) 98.014,70.909 ; C2.2@97.421,70.633 cw(c98.051,70.056) 98.014,70.909 ; C2.2@97.421,70.633 cw(c98.051,70.056) 98.014,70.909 ; C2.2@97.421,70.633 cw(c98.051,70.056) 98.014,70.909 ; C2.2@97.421,70.633 cw(c98.051,70.056) 98.014,70.909 ; C2.2@97.426,70.638 cw(c98.063,70.068) 98.015,70.921 ; C2.2@97.426,70.638 cw(c98.063,70.068) 98.015,70.921 ; C2.2@97.426,70.638 cw(c98.063,70.068) 98.015,70.921 ; C2.2@97.426,70.638 cw(c98.063,70.068) 98.015,70.921 ; C2.2@97.426,70.638 cw(c98.063,70.068) 98.015,70.921 ; C2.2@97.502,70.749 cw(c98.041,70.471) 98.193,71.058 ; C2.2@97.502,70.749 cw(c97.893,70.548) 97.83,70.983 ; C2.2@97.502,70.749 cw(c98.041,70.471) 98.193,71.058 ; C2.2@97.502,70.749 cw(c97.893,70.548) 97.83,70.983 ; C2.2@97.502,70.749 cw(c98.041,70.471) 98.193,71.058 ; C2.2@97.502,70.749 cw(c97.893,70.548) 97.83,70.983 ; C2.2@97.502,70.749 cw(c98.041,70.471) 98.193,71.058 ; C2.2@97.502,70.749 cw(c97.893,70.548) 97.83,70.983 ; C2.2@97.502,70.749 cw(c98.041,70.471) 98.193,71.058 ; C2.2@97.502,70.749 cw(c97.893,70.548) 97.83,70.983 ; C2.2@97.533,71.165 ccw(c97.791,71.252) 97.83,70.983 ; C2.2@97.533,71.165 ccw(c97.791,71.252) 97.83,70.983 ; C2.2@97.533,71.165 ccw(c97.791,71.252) 97.83,70.983 ; C2.2@97.533,71.165 ccw(c97.791,71.252) 97.83,70.983 ; C2.2@97.533,71.165 ccw(c97.791,71.252) 97.83,70.983 ; 98.247,71.044 98.625,71.069 99.009,71.095 100.161,71.115 ; 99.797,70.866 100.162,70.866 100.208,70.912 ; 99.797,70.866 99.91,70.908 ; 99.797,70.866 99.857,70.907 ; 99.857,70.907 99.952,70.972 100.044,71.035 ; 99.857,70.907 99.91,70.908 ; 99.91,70.908 100.294,71.049 ; 99.91,70.908 100.208,70.912 ; 100.044,71.035 100.161,71.115 ; 100.044,71.035 100.294,71.049 ; 100.161,71.115 pad.18@100.944,71.649 100.373,71.078 ; 100.208,70.912 101.041,71.323 100.373,71.078 ; 100.208,70.912 100.347,71.052 ; 100.294,71.049 100.373,71.078 ; 100.294,71.049 100.347,71.052 ; 100.347,71.052 100.373,71.078 ; 100.349,71.243 cw(c100.755,70.648) pad.18@100.889,71.356 ; 100.349,71.243 ccw(c99.943,71.838) pad.18@100.651,71.704 ; 100.349,71.243 cw(c100.755,70.648) pad.18@100.889,71.356 ; 100.349,71.243 ccw(c99.943,71.838) pad.18@100.651,71.704 ; 100.349,71.243 cw(c100.755,70.648) pad.18@100.889,71.356 ; 100.349,71.243 ccw(c99.943,71.838) pad.18@100.651,71.704 ; 100.349,71.243 cw(c100.755,70.648) pad.18@100.889,71.356 ; 100.349,71.243 ccw(c99.943,71.838) pad.18@100.651,71.704 ; 100.349,71.243 ccw(c99.943,71.838) pad.18@100.651,71.704 ; 100.349,71.243 cw(c100.755,70.648) pad.18@100.889,71.356 ; 127.508,83.106 127.587,83.106 ; 127.508,83.106 127.781,82.671 ; 127.584,81.686 pad.4@127.809,81.606 ; 127.584,81.686 127.792,82.24 ; 127.584,81.686 pad.4@127.889,81.407 ; 127.587,83.106 127.775,82.918 ; pad.4@127.678,81.618 ccw(c127.169,82.127) 127.889,82.127 ; pad.4@127.678,81.618 ccw(c127.169,82.127) 127.889,82.127 ; pad.4@127.678,81.618 ccw(c127.169,82.127) 127.889,82.127 ; pad.4@127.678,81.618 ccw(c127.169,82.127) 127.889,82.127 ; pad.4@127.678,81.618 ccw(c127.169,82.127) 127.889,82.127 ; 127.775,82.918 127.889,82.804 ; 127.775,82.918 127.889,82.499 ; 127.775,82.918 127.781,82.671 ; 127.781,82.671 127.889,82.499 ; 127.781,82.671 127.792,82.24 ; 127.792,82.24 127.889,82.499 ; pad.4@127.809,81.606 pad.4@127.889,81.578 ; pad.4@127.809,81.606 127.737,81.788 127.889,82.271 ; pad.4@127.809,81.606 pad.4@127.889,81.407 ; pad.4@127.823,81.475 ccw(c127.425,81.883) 127.959,82.08 ; pad.4@127.823,81.475 ccw(c127.425,81.883) 127.959,82.08 ; pad.4@127.823,81.475 ccw(c127.425,81.883) 127.959,82.08 ; pad.4@127.823,81.475 ccw(c127.425,81.883) 127.959,82.08 ; pad.4@127.823,81.475 ccw(c127.425,81.883) 127.959,82.08 ; pad.4@127.889,81.407 pad.4@127.889,81.578 ; pad.4@127.889,81.407 pad.4@127.957,81.553 ; pad.4@127.889,81.578 127.889,82.271 ; pad.4@127.889,81.578 127.943,81.558 pad.4@127.957,81.553 ; 127.889,82.127 ccw(c128.609,82.127) pad.4@128.1,81.618 ; 127.889,82.127 ccw(c128.609,82.127) pad.4@128.1,81.618 ; 127.889,82.127 ccw(c128.609,82.127) pad.4@128.1,81.618 ; 127.889,82.127 ccw(c128.609,82.127) pad.4@128.1,81.618 ; 127.889,82.127 ccw(c128.609,82.127) pad.4@128.1,81.618 ; 127.889,82.271 127.889,82.499 ; 127.889,82.271 128.067,81.788 pad.4@127.957,81.553 ; 127.889,82.499 127.889,82.804 ; 127.889,82.499 128.051,82.044 ; 127.889,82.804 128.051,82.044 ; pad.4@127.957,81.553 128.295,81.432 128.235,81.564 128.168,81.712 128.051,82.044 ; pad.4@127.964,81.33 ccw(c127.664,81.637) 128.068,81.786 ; pad.4@127.964,81.33 ccw(c127.664,81.637) 128.068,81.786 ; pad.4@127.964,81.33 ccw(c127.664,81.637) 128.068,81.786 ; pad.4@127.964,81.33 ccw(c127.664,81.637) 128.068,81.786 ; pad.4@127.964,81.33 ccw(c127.664,81.637) 128.068,81.786 ; pad.4@131.191,74.466 ccw(c131.191,75.187) 131.7,74.677 ; pad.4@131.191,74.466 ccw(c131.191,75.187) 131.7,74.677 ; pad.4@131.191,74.466 ccw(c131.191,75.187) 131.7,74.677 ; pad.4@131.191,74.466 ccw(c131.191,75.187) 131.7,74.677 ; pad.4@131.191,74.466 ccw(c131.191,75.187) 131.7,74.677 ; pad.4@131.445,74.422 ccw(c129.961,75.906) C5.1@132.056,76.039 ; pad.4@131.445,74.422 ccw(c129.961,75.906) C5.1@132.056,76.039 ; pad.4@131.445,74.422 ccw(c129.961,75.906) C5.1@132.056,76.039 ; pad.4@131.445,74.422 ccw(c129.961,75.906) C5.1@132.056,76.039 ; pad.4@131.445,74.422 ccw(c129.961,75.906) C5.1@132.056,76.039 ; pad.4@131.489,74.168 cw(c132.21,74.168) 131.7,74.677 ; pad.4@131.489,74.168 cw(c132.21,74.168) 131.7,74.677 ; pad.4@131.489,74.168 cw(c132.21,74.168) 131.7,74.677 ; pad.4@131.489,74.168 cw(c132.21,74.168) 131.7,74.677 ; pad.4@131.489,74.168 cw(c132.21,74.168) 131.7,74.677 ; 131.763,74.74 ccw(c130.559,75.944) C5.1@132.258,76.052 ; 131.763,74.74 ccw(c130.559,75.944) C5.1@132.258,76.052 ; 131.763,74.74 ccw(c130.559,75.944) C5.1@132.258,76.052 ; 131.763,74.74 ccw(c130.559,75.944) C5.1@132.258,76.052 ; 131.763,74.74 ccw(c130.559,75.944) C5.1@132.258,76.052 ; 132.081,75.058 ccw(c131.157,75.982) C5.1@132.461,76.065 ; 132.081,75.058 ccw(c131.157,75.982) C5.1@132.461,76.065 ; 132.081,75.058 ccw(c131.157,75.982) C5.1@132.461,76.065 ; 132.081,75.058 ccw(c131.157,75.982) C5.1@132.461,76.065 ; 132.081,75.058 ccw(c131.157,75.982) C5.1@132.461,76.065 ; 132.399,75.376 ccw(c131.755,76.02) C5.1@132.664,76.078 ; 132.399,75.376 ccw(c131.755,76.02) C5.1@132.664,76.078 ; 132.399,75.376 ccw(c131.755,76.02) C5.1@132.664,76.078 ; 132.399,75.376 ccw(c131.755,76.02) C5.1@132.664,76.078 ; 132.399,75.376 ccw(c131.755,76.02) C5.1@132.664,76.078 ; C5.1@132.821,75.967 cw(c133.385,75.403) 133.385,76.2 ; C5.1@132.821,75.967 cw(c133.385,75.403) 133.385,76.2 ; C5.1@132.821,75.967 cw(c133.385,75.403) 133.385,76.2 ; C5.1@132.821,75.967 cw(c133.385,75.403) 133.385,76.2 ; C5.1@132.821,75.967 cw(c133.385,75.403) 133.385,76.2 ; C5.1@132.821,76.433 ccw(c133.385,76.997) 133.385,76.2 ; C5.1@132.821,76.433 ccw(c133.385,76.997) 133.385,76.2 ; C5.1@132.821,76.433 ccw(c133.385,76.997) 133.385,76.2 ; C5.1@132.821,76.433 ccw(c133.385,76.997) 133.385,76.2 ; C5.1@132.821,76.433 ccw(c133.385,76.997) 133.385,76.2 ; C5.1@132.965,75.823 cw(c133.876,74.912) 133.876,76.2 ; C5.1@132.965,75.823 cw(c133.876,74.912) 133.876,76.2 ; C5.1@132.965,75.823 cw(c133.876,74.912) 133.876,76.2 ; C5.1@132.965,75.823 cw(c133.876,74.912) 133.876,76.2 ; C5.1@132.965,75.823 cw(c133.876,74.912) 133.876,76.2 ; C5.1@132.965,76.577 ccw(c133.876,77.488) 133.876,76.2 ; C5.1@132.965,76.577 ccw(c133.876,77.488) 133.876,76.2 ; C5.1@132.965,76.577 ccw(c133.876,77.488) 133.876,76.2 ; C5.1@132.965,76.577 ccw(c133.876,77.488) 133.876,76.2 ; C5.1@132.965,76.577 ccw(c133.876,77.488) 133.876,76.2 ; 138.429,77.088 cw(c138.938,76.578) pad.2@138.938,77.299 ; 138.429,77.088 ccw(c137.919,77.597) pad.2@138.64,77.597 ; 138.429,77.088 cw(c138.938,76.578) pad.2@138.938,77.299 ; 138.429,77.088 ccw(c137.919,77.597) pad.2@138.64,77.597 ; 138.429,77.088 cw(c138.938,76.578) pad.2@138.938,77.299 ; 138.429,77.088 ccw(c137.919,77.597) pad.2@138.64,77.597 ; 138.429,77.088 cw(c138.938,76.578) pad.2@138.938,77.299 ; 138.429,77.088 ccw(c137.919,77.597) pad.2@138.64,77.597 ; 138.429,77.088 ccw(c137.919,77.597) pad.2@138.64,77.597 ; 138.429,77.088 cw(c138.938,76.578) pad.2@138.938,77.299 ; C3.1@140.339,84.967 cw(c139.428,84.056) 140.716,84.056 ; C3.1@140.339,84.967 cw(c139.428,84.056) 140.716,84.056 ; C3.1@140.339,84.967 cw(c139.428,84.056) 140.716,84.056 ; C3.1@140.339,84.967 cw(c139.428,84.056) 140.716,84.056 ; C3.1@140.339,84.967 cw(c139.428,84.056) 140.716,84.056 ; C3.1@140.339,85.721 ccw(c139.428,86.632) 140.716,86.632 ; C3.1@140.339,85.721 ccw(c139.428,86.632) 140.716,86.632 ; C3.1@140.339,85.721 ccw(c139.428,86.632) 140.716,86.632 ; C3.1@140.339,85.721 ccw(c139.428,86.632) 140.716,86.632 ; C3.1@140.339,85.721 ccw(c139.428,86.632) 140.716,86.632 ; C4.1@140.339,90.047 cw(c139.428,89.136) 140.716,89.136 ; C4.1@140.339,90.047 cw(c139.428,89.136) 140.716,89.136 ; C4.1@140.339,90.047 cw(c139.428,89.136) 140.716,89.136 ; C4.1@140.339,90.047 cw(c139.428,89.136) 140.716,89.136 ; C4.1@140.339,90.047 cw(c139.428,89.136) 140.716,89.136 ; C3.1@140.483,85.111 cw(c139.919,84.547) 140.716,84.547 ; C3.1@140.483,85.111 cw(c139.919,84.547) 140.716,84.547 ; C3.1@140.483,85.111 cw(c139.919,84.547) 140.716,84.547 ; C3.1@140.483,85.111 cw(c139.919,84.547) 140.716,84.547 ; C3.1@140.483,85.111 cw(c139.919,84.547) 140.716,84.547 ; C3.1@140.483,85.577 ccw(c139.919,86.141) 140.716,86.141 ; C3.1@140.483,85.577 ccw(c139.919,86.141) 140.716,86.141 ; C3.1@140.483,85.577 ccw(c139.919,86.141) 140.716,86.141 ; C3.1@140.483,85.577 ccw(c139.919,86.141) 140.716,86.141 ; C3.1@140.483,85.577 ccw(c139.919,86.141) 140.716,86.141 ; C4.1@140.483,90.191 cw(c139.919,89.627) 140.716,89.627 ; C4.1@140.483,90.191 cw(c139.919,89.627) 140.716,89.627 ; C4.1@140.483,90.191 cw(c139.919,89.627) 140.716,89.627 ; C4.1@140.483,90.191 cw(c139.919,89.627) 140.716,89.627 ; C4.1@140.483,90.191 cw(c139.919,89.627) 140.716,89.627 ; pad.3@140.505,83.396 ccw(c139.996,83.905) 140.716,83.905 ; pad.3@140.505,83.396 ccw(c139.996,83.905) 140.716,83.905 ; pad.3@140.505,83.396 ccw(c139.996,83.905) 140.716,83.905 ; pad.3@140.505,83.396 ccw(c139.996,83.905) 140.716,83.905 ; pad.3@140.505,83.396 ccw(c139.996,83.905) 140.716,83.905 ; 140.716,83.905 ccw(c141.436,83.905) pad.3@140.927,83.396 ; 140.716,83.905 ccw(c141.436,83.905) pad.3@140.927,83.396 ; 140.716,83.905 ccw(c141.436,83.905) pad.3@140.927,83.396 ; 140.716,83.905 ccw(c141.436,83.905) pad.3@140.927,83.396 ; 140.716,83.905 ccw(c141.436,83.905) pad.3@140.927,83.396 ; 140.716,84.056 cw(c142.004,84.056) C3.1@141.093,84.967 ; 140.716,84.056 cw(c142.004,84.056) C3.1@141.093,84.967 ; 140.716,84.056 cw(c142.004,84.056) C3.1@141.093,84.967 ; 140.716,84.056 cw(c142.004,84.056) C3.1@141.093,84.967 ; 140.716,84.056 cw(c142.004,84.056) C3.1@141.093,84.967 ; 140.716,84.547 cw(c141.513,84.547) C3.1@140.949,85.111 ; 140.716,84.547 cw(c141.513,84.547) C3.1@140.949,85.111 ; 140.716,84.547 cw(c141.513,84.547) C3.1@140.949,85.111 ; 140.716,84.547 cw(c141.513,84.547) C3.1@140.949,85.111 ; 140.716,84.547 cw(c141.513,84.547) C3.1@140.949,85.111 ; 140.716,86.141 ccw(c141.513,86.141) C3.1@140.949,85.577 ; 140.716,86.141 ccw(c141.513,86.141) C3.1@140.949,85.577 ; 140.716,86.141 ccw(c141.513,86.141) C3.1@140.949,85.577 ; 140.716,86.141 ccw(c141.513,86.141) C3.1@140.949,85.577 ; 140.716,86.141 ccw(c141.513,86.141) C3.1@140.949,85.577 ; 140.716,86.632 ccw(c142.004,86.632) C3.1@141.093,85.721 ; 140.716,86.632 ccw(c142.004,86.632) C3.1@141.093,85.721 ; 140.716,86.632 ccw(c142.004,86.632) C3.1@141.093,85.721 ; 140.716,86.632 ccw(c142.004,86.632) C3.1@141.093,85.721 ; 140.716,86.632 ccw(c142.004,86.632) C3.1@141.093,85.721 ; 140.716,89.136 cw(c142.004,89.136) C4.1@141.093,90.047 ; 140.716,89.136 cw(c142.004,89.136) C4.1@141.093,90.047 ; 140.716,89.136 cw(c142.004,89.136) C4.1@141.093,90.047 ; 140.716,89.136 cw(c142.004,89.136) C4.1@141.093,90.047 ; 140.716,89.136 cw(c142.004,89.136) C4.1@141.093,90.047 ; 140.716,89.627 cw(c141.513,89.627) C4.1@140.949,90.191 ; 140.716,89.627 cw(c141.513,89.627) C4.1@140.949,90.191 ; 140.716,89.627 cw(c141.513,89.627) C4.1@140.949,90.191 ; 140.716,89.627 cw(c141.513,89.627) C4.1@140.949,90.191 ; 140.716,89.627 cw(c141.513,89.627) C4.1@140.949,90.191
  Bottom Layer w0.762: 98.625,71.069 C2.2@97.028,70.866 ; 99.952,70.972 C2.2@97.028,70.866 ; pad.18@100.944,71.649 98.104,71.081 C2.2@97.028,70.866 ; C2.2@97.184,71.194 ccw(c97.822,72.019) 97.954,70.984 ; C2.2@97.184,71.194 ccw(c97.822,72.019) 97.954,70.984 ; C2.2@97.184,71.194 ccw(c97.822,72.019) 97.954,70.984 ; C2.2@97.184,71.194 ccw(c97.822,72.019) 97.954,70.984 ; C2.2@97.184,71.194 ccw(c97.822,72.019) 97.954,70.984 ; C2.2@97.194,71.185 ccw(c97.668,71.733) 97.81,71.022 ; C2.2@97.194,71.185 ccw(c97.668,71.733) 97.81,71.022 ; C2.2@97.194,71.185 ccw(c97.668,71.733) 97.81,71.022 ; C2.2@97.194,71.185 ccw(c97.668,71.733) 97.81,71.022 ; C2.2@97.194,71.185 ccw(c97.668,71.733) 97.81,71.022 ; C2.2@97.201,71.179 ccw(c97.914,71.945) 97.952,70.899 ; C2.2@97.201,71.179 ccw(c97.914,71.945) 97.952,70.899 ; C2.2@97.201,71.179 ccw(c97.914,71.945) 97.952,70.899 ; C2.2@97.201,71.179 ccw(c97.914,71.945) 97.952,70.899 ; C2.2@97.201,71.179 ccw(c97.914,71.945) 97.952,70.899